# Altium PCB PCB2.PcbDoc (part 2 of 2)
Units mil, origin at the board's own origin, x right, y up, seen from the top; angles counter-clockwise.
Board outline 3622.05 x 2165.35 mil, 4 copper layers (Top Layer, GND, Sign, Bottom Layer), stack 23.756 mil thick; 141 components, 92 nets, 526 pads, 935 vias.
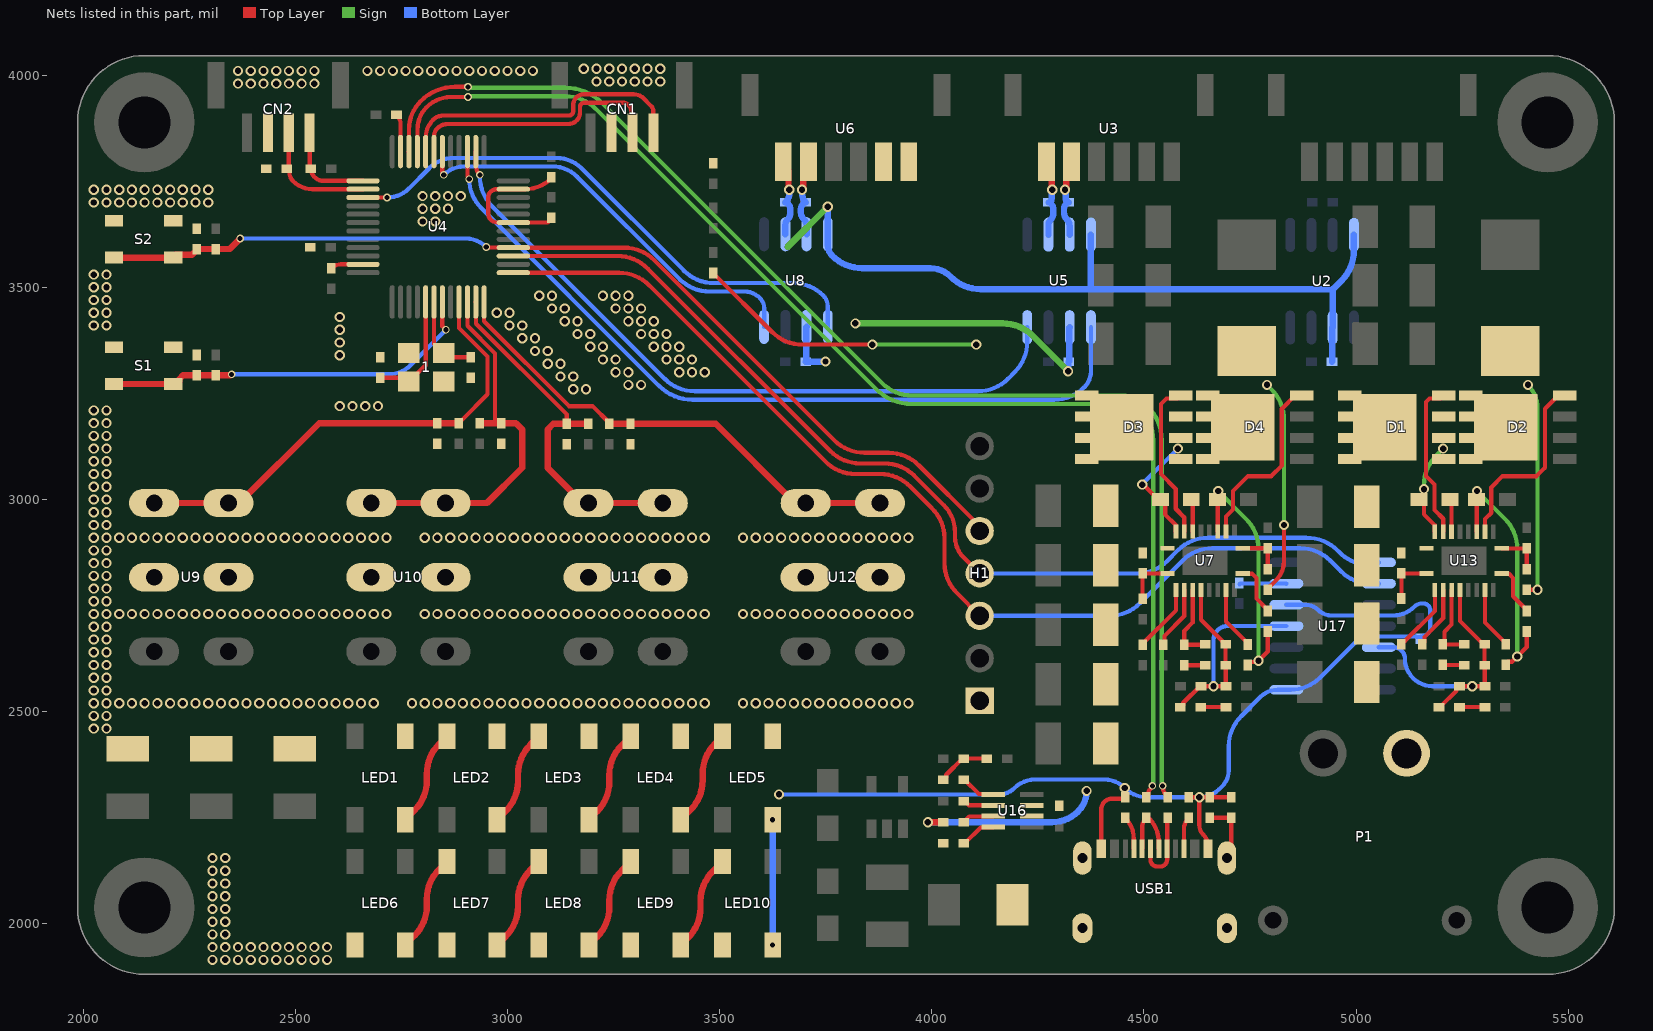
[diagram p4: the nets of this part, all layers, seen from the top]

## Via types
v1: diameter 24, hole 15, Top Layer to Bottom Layer, 881 vias
v2: diameter 18, hole 12, Top Layer to Bottom Layer, 51 vias
v3: diameter 28, hole 15, Top Layer to Bottom Layer, 2 vias
v4: diameter 30, hole 18, Top Layer to Bottom Layer, 1 vias

## Nets (pads, with @x,y where several pads share a name; then routed paths per layer and width w, separated by ;. In a path a pad name is that pad's centre, name@x,y a point inside that pad or via, vN(x,y) a via of type N, cw(c..) or ccw(c..) an arc to the next point about the centre after c; other vN are vias at no path point) (continued)
FDCAN2_N: R3.1 U3.6 U5.6 | length 179.1
  Top Layer w15: U3.6@4270.31,3795.51 cw(c4241.18,3766.38) 4282.38,3766.38 4282.38,3734.16 ccw(c4288.26,3734.16) v1(4284.1,3730)
  Bottom Layer w15: U5.6@4275,3624.15 4275,3645.89 cw(c4294.8,3645.89) 4280.8,3659.89 ccw(c4266.8,3673.9) 4286.6,3673.9 4286.6,3684.47 ccw(c4271.07,3684.47) R3.1@4282.05,3695.45 ; R3.1@4275,3700 ccw(c4275,3706.04) 4279.27,3701.77 ccw(c4271.76,3709.28) 4282.38,3709.28 4282.38,3725.84 cw(c4288.26,3725.84) v1(4284.1,3730)
FDCAN2_P: R3.2 U3.5 U5.7 | length 180
  Top Layer w15: v1(4314.1,3730) 4314.1,3730.26 cw(c4319.35,3730.26) 4315.64,3733.97 ccw(c4311.92,3737.69) 4317.18,3737.69 4317.18,3766.09 cw(c4358.78,3766.09) U3.5@4329.36,3795.51
  Bottom Layer w15: v1(4314.1,3730) cw(c4309.94,3725.84) 4315.82,3725.84 4315.82,3709.28 ccw(c4326.44,3709.28) 4318.93,3701.77 ccw(c4323.2,3706.04) R3.2@4323.2,3700 ; R3.2@4316.15,3695.45 ccw(c4327.13,3684.47) 4311.6,3684.47 4311.6,3676.07 ccw(c4334.48,3676.07) 4318.3,3659.89 cw(c4302.12,3643.72) 4325,3643.72 U5.7@4325,3624.15
FDCAN2_RX: U4.26 U5.4 | length 1674.8
  Top Layer w10: U4.26@2925.35,3819.88 2925.35,3788.29 ccw(c2958.29,3788.29) v2(2935,3765)
  Bottom Layer w10: v2(2935,3765) 2935,3761.42 ccw(c3035,3761.42) 2964.29,3690.71 3370.71,3284.29 ccw(c3441.42,3355) 3441.42,3255 4108.58,3255 ccw(c4108.58,3355) 4179.29,3284.29 4195.71,3300.71 ccw(c4125,3371.42) 4225,3371.42 U5.4@4225,3405.85
FDCAN2_TX: U4.27 U5.1 | length 1898.8
  Top Layer w10: U4.27@2905.67,3819.88 2905.67,3765.46 ccw(c2920.46,3765.46) v2(2910,3755)
  Bottom Layer w10: v2(2910,3755) ccw(c3006.57,3755) 2938.28,3686.72 3357.18,3267.82 ccw(c3436.42,3347.07) 3436.42,3235 4288.58,3235 ccw(c4288.58,3335) 4359.29,3264.29 ccw(c4321.36,3302.22) 4375,3302.22 U5.1@4375,3405.85
FDCAN3_N: R5.1 U6.6 U8.6 | length 209.1
  Top Layer w15: U6.6@3662.42,3766.09 ccw(c3620.82,3766.09) U6.6@3650.23,3795.51 cw(c3620.92,3766.19) 3662.38,3766.19 3662.38,3734.16 ccw(c3668.26,3734.16) v1(3664.1,3730)
  Bottom Layer w15: U8.6@3655,3625 3655,3646.74 cw(c3674.8,3646.74) 3660.8,3660.74 ccw(c3646.8,3674.75) 3666.6,3674.75 3666.6,3684.47 ccw(c3651.07,3684.47) R5.1@3662.05,3695.45 ; R5.1@3655,3700 ccw(c3633.03,3721.97) 3664.1,3721.97 v1(3664.1,3730)
FDCAN3_P: R5.2 U6.5 U8.7 | length 177.3
  Top Layer w15: v1(3694.1,3730) 3694.1,3730.31 cw(c3699.22,3730.31) 3695.6,3733.93 ccw(c3691.98,3737.55) 3697.1,3737.55 3697.1,3766.09 cw(c3738.7,3766.09) U6.5@3709.28,3795.51
  Bottom Layer w15: v1(3694.1,3730) 3694.1,3721.97 ccw(c3725.17,3721.97) R5.2@3703.2,3700 ; R5.2@3696.15,3695.45 ccw(c3707.13,3684.47) 3691.6,3684.47 3691.6,3676.92 ccw(c3714.48,3676.92) 3698.3,3660.74 cw(c3682.12,3644.57) 3705,3644.57 U8.7@3705,3625
FDCAN3_RX: U4.30 U8.4 | length 995.4
  Top Layer w10: U4.30@2846.61,3819.88 2846.61,3773.18 ccw(c2858.18,3773.18) v2(2850,3765)
  Bottom Layer w10: v2(2850,3765) cw(c2898.28,3716.72) 2898.28,3785 3105.65,3785 cw(c3105.65,3702.07) 3164.29,3760.71 3405.71,3519.29 ccw(c3476.42,3590) 3476.42,3490 3558.79,3490 cw(c3558.79,3438.79) 3595,3475 cw(c3570.86,3450.86) 3605,3450.86 U8.4@3605,3406.7
FDCAN3_TX: U4.39 U8.1 | length 1320
  Top Layer w10: U4.39@2659.61,3711.61 v2(2716.1,3711.61)
  Bottom Layer w10: v2@2720,3710 ccw(c2716.1,3706.1) v2(2716.1,3711.61) ccw(c2716.1,3785.27) 2768.19,3733.19 2815.71,3780.71 cw(c2874.35,3722.07) 2874.35,3805 3115.65,3805 cw(c3115.65,3722.07) 3174.29,3780.71 3415.71,3539.29 ccw(c3486.42,3610) 3486.42,3510 3673.58,3510 cw(c3673.58,3410) 3744.29,3480.71 cw(c3718.43,3454.85) 3755,3454.85 U8.1@3755,3406.7
GND: 1.2 1.4 C1.2 C2.2 C3.1 C4.1 C5.1 C6.1 C7.2 C8.1 C9.2 C10.1 C11.2 C14.1 C17.1 C20.1 C21.1 C32.1 C33.1 C34.1 C35.1 C69.1 CN1.2 CN2.2 H1.1 LED1.3 LED2.3 LED3.3 LED4.3 LED5.3 LED6.3 LED7.3 LED8.3 LED9.3 LED10.3 R1.1 R6.2 R10.2 R14.2 R44.1 R45.2 S1.1 S2.1 U2.2 U2.8 U4.19 U4.23 U4.35 U4.47 U5.2 U5.8 U8.2 U8.8 U9.2 U9.5 U10.2 U10.5 U11.2 U11.5 U12.2 U12.5 U17.1 U17.5 USB1.1 USB1.12 | length 5814
  Top Layer w8: v1(4455,2320) 4455.63,2319.37 R14.2@4455.63,2298.2
  Top Layer w10: C6.1@2585,3545 cw(c2607.05,3522.95) 2607.05,3554.13 U4.47@2659.61,3554.13 ; C11.2@2738.46,3906.85 cw(c2714.99,3883.38) 2748.19,3883.38 U4.35@2748.19,3819.88 ; C10.1@3103.46,3663.65 3103.46,3661.15 3094.87,3652.56 U4.19@3013.94,3652.56 2977.97,3652.56 cw(c2977.97,3677.97) 2960,3660 cw(c2972.07,3672.07) 2955,3672.07 2955,3712.93 cw(c2972.07,3712.93) 2960,3725 cw(c2975.21,3709.79) 2975.21,3731.3 U4.23@3013.94,3731.3 3041.78,3731.3 ccw(c3041.78,3818.54) 3103.43,3756.81 ccw(c3041.78,3818.54) 3103.46,3756.85 C5.1@3103.46,3759.35 C5.1@3103.46,3761.85 ; USB1.1@4399.37,2176.65 4399.37,2269.37 cw(c4425,2269.37) 4425,2295 4452.43,2295 ccw(c4452.43,2298.2) R14.2@4455.63,2298.2 ; R6.2@4605.63,2298.2 v1(4630.63,2298.2) ; USB1.12@4651.34,2176.65 4651.34,2182.63 ccw(c4612.63,2182.63) 4640,2210 cw(c4662.62,2232.62) 4630.63,2232.62 v1(4630.63,2298.2) ; C9.2@4705.63,2298.2 R10.2@4655.63,2298.2 v1(4630.63,2298.2)
  Sign w15: 3660,3595 v1(3755,3690) ; v1(3820,3415) 4167.16,3415 cw(c4167.16,3315) 4237.87,3385.71 v1(4321.36,3302.22)
  Bottom Layer w10: v1(3640,2305) 4158.79,2305 ccw(c4158.79,2356.21) 4195,2320 cw(c4243.28,2271.72) 4243.28,2340 4406.72,2340 cw(c4406.72,2271.72) v1(4455,2320) ccw(c4507.63,2372.63) 4507.63,2298.2 v1(4630.63,2298.2) ccw(c4630.63,2364.76) 4677.69,2317.7 4685,2325 ccw(c4648.79,2361.21) 4700,2361.21 4700,2418.58 cw(c4800,2418.58) 4729.29,2489.29 4775,2535 cw(c4815.25,2494.75) 4815.25,2551.67 U17.1@4835.64,2551.67 4845.25,2551.67 ccw(c4845.25,2651.67) 4915.96,2580.96 5000.77,2665.77 cw(c5028.8,2637.74) 5028.8,2677.38 5136.52,2677.38 cw(c5136.52,2658.32) 5143.46,2676.07 5148.45,2676.07 ccw(c5148.45,2706.55) 5170,2685 ccw(c5157.93,2697.07) 5175,2697.07 5175,2737.93 ccw(c5157.93,2737.93) 5170,2750 ccw(c5157.93,2737.93) 5157.93,2755 5155.4,2755 ccw(c5155.4,2730.13) 5137.82,2747.72 cw(c5087.23,2798.31) 5087.23,2726.76 4941.96,2726.76 cw(c4941.96,2771.96) 4910,2740 ccw(c4881.82,2711.82) 4881.82,2751.67 U17.5@4835.64,2751.67
  Bottom Layer w15: U8.2@3705,3406.7 3704.1,3405.8 3704.1,3325.9 C7.2@3703.2,3325 3749.64,3325 v1(3749.71,3325.07) ; v1(3755,3690) U8.8@3755,3625 3755,3599.14 ccw(c3789.14,3599.14) 3765,3575 3765.71,3574.29 ccw(c3836.42,3645) 3836.42,3545 3996.72,3545 cw(c3996.72,3476.72) 4045,3525 ccw(c4115.32,3593.92) 4115.26,3495.46 4375,3495.46 ; v1(4321.36,3302.22) 4322.28,3303.14 4322.28,3324.08 C2.2@4323.2,3325 4324.1,3325.9 4324.1,3404.95 U5.2@4325,3405.85 ; U5.8@4375,3624.15 4375,3495.46 ; C1.2@4943.2,3325 4943.98,3325.78 4943.98,3404.52 U2.2@4944.76,3405.3 4944.76,3494.76 ; U2.8@4994.76,3623.6 4994.76,3586.19 cw(c4894.76,3586.19) 4965.47,3515.47 4944.76,3494.76 ; 4375,3495.46 4944.76,3495.46 4945,3495.46 4944.76,3494.76
  other v1: 2305,1915 2335,1915 2365,1915 2395,1915 2425,1915 2455,1915 2485,1915 2515,1915 2545,1915 2575,1915 2305,1945 2335,1945 2365,1945 2395,1945 2425,1945 2455,1945 2485,1945 2515,1945 2545,1945 2575,1945 2305,1975 2335,1975 2305,2005 2335,2005 2305,2035 2335,2035 2305,2065 2335,2065 2305,2095 2335,2095 2305,2125 2335,2125 2305,2155 2335,2155 2025,2460 2055,2460 2025,2490 2055,2490 2025,2520 2055,2520 2085,2520 2115,2520 2145,2520 2175,2520 2205,2520 2235,2520 2265,2520 2295,2520 2325,2520 2355,2520 2385,2520 2415,2520 2445,2520 2475,2520 2505,2520 2535,2520 2565,2520 2595,2520 2625,2520 2655,2520 2685,2520 2775,2520 2805,2520 2835,2520 2865,2520 2895,2520 2925,2520 2955,2520 2985,2520 3015,2520 3045,2520 3075,2520 3105,2520 3135,2520 3165,2520 3195,2520 3225,2520 3255,2520 3285,2520 3315,2520 3345,2520 3375,2520 3405,2520 3435,2520 3465,2520 3555,2520 3585,2520 3615,2520 3645,2520 3675,2520 3705,2520 3735,2520 3765,2520 3795,2520 3825,2520 3855,2520 3885,2520 3915,2520 3945,2520 2025,2550 2055,2550 2025,2580 2055,2580 2025,2610 2055,2610 2025,2640 2055,2640 2025,2670 2055,2670 2025,2700 2055,2700 2025,2730 2055,2730 2085,2730 2115,2730 2145,2730 2175,2730 2205,2730 2235,2730 2265,2730 2295,2730 2325,2730 2355,2730 2385,2730 2415,2730 2445,2730 2475,2730 2505,2730 2535,2730 2565,2730 2595,2730 2625,2730 2655,2730 2685,2730 2715,2730 2805,2730 2835,2730 2865,2730 2895,2730 2925,2730 2955,2730 2985,2730 3015,2730 3045,2730 3075,2730 3105,2730 3135,2730 3165,2730 3195,2730 3225,2730 3255,2730 3285,2730 3315,2730 3345,2730 3375,2730 3405,2730 3435,2730 3465,2730 3555,2730 3585,2730 3615,2730 3645,2730 3675,2730 3705,2730 3735,2730 3765,2730 3795,2730 3825,2730 3855,2730 3885,2730 3915,2730 3945,2730 2025,2760 2055,2760 2025,2790 2055,2790 2025,2820 2055,2820 2025,2850 2055,2850 2025,2880 2055,2880 2025,2910 2055,2910 2085,2910 2115,2910 2145,2910 2175,2910 2205,2910 2235,2910 2265,2910 2295,2910 2325,2910 2355,2910 2385,2910 2415,2910 2445,2910 2475,2910 2505,2910 2535,2910 2565,2910 2595,2910 2625,2910 2655,2910 2685,2910 2715,2910 2805,2910 2835,2910 2865,2910 2895,2910 2925,2910 2955,2910 2985,2910 3015,2910 3045,2910 3075,2910 3105,2910 3135,2910 3165,2910 3195,2910 3225,2910 3255,2910 3285,2910 3315,2910 3345,2910 3375,2910 3405,2910 3435,2910 3465,2910 3555,2910 3585,2910 3615,2910 3645,2910 3675,2910 3705,2910 3735,2910 3765,2910 3795,2910 3825,2910 3855,2910 3885,2910 3915,2910 3945,2910 2025,2940 2055,2940 2025,2970 2055,2970 2025,3000 2055,3000 2025,3030 2055,3030 2025,3060 2055,3060 2025,3090 2055,3090 2025,3120 2055,3120 2025,3150 2055,3150 2025,3180 2055,3180 2025,3210 2055,3210 2605,3220 2635,3220 2665,3220 2695,3220 3155,3260 3185,3260 3285,3270 3315,3270 3125,3290 3155,3290 3255,3300 3285,3300 3405,3300 3435,3300 3465,3300 3095,3320 3125,3320 3225,3330 3255,3330 3375,3330 3405,3330 3435,3330 2605,3340 3065,3350 3095,3350 3195,3360 3225,3360 3345,3360 3375,3360 3405,3360 2605,3370 3035,3380 3065,3380 3165,3390 3195,3390 3315,3390 3345,3390 3375,3390 2605,3400 2025,3410 2055,3410 3005,3410 3035,3410 3135,3420 3165,3420 3285,3420 3315,3420 3345,3420 2605,3430 2025,3440 2055,3440 2975,3440 3005,3440 3105,3450 3135,3450 3255,3450 3285,3450 3315,3450 2025,3470 2055,3470 3075,3480 3105,3480 3225,3480 3255,3480 3285,3480 2025,3500 2055,3500 2025,3530 2055,3530 2800,3655 2830,3655 2800,3685 2830,3685 2860,3685 2025,3700 2055,3700 2085,3700 2115,3700 2145,3700 2175,3700 2205,3700 2235,3700 2265,3700 2295,3700 2800,3715 2830,3715 2860,3715 2890,3715 2025,3730 2055,3730 2085,3730 2115,3730 2145,3730 2175,3730 2205,3730 2235,3730 2265,3730 2295,3730 2365,3980 2395,3980 2425,3980 2455,3980 2485,3980 2515,3980 2545,3980 3210,3985 3240,3985 3270,3985 3300,3985 3330,3985 3360,3985 2365,4010 2395,4010 2425,4010 2455,4010 2485,4010 2515,4010 2545,4010 2670,4010 2700,4010 2730,4010 2760,4010 2790,4010 2820,4010 2850,4010 2880,4010 2910,4010 2940,4010 2970,4010 3000,4010 3030,4010 3060,4010 3180,4015 3210,4015 3240,4015 3270,4015 3300,4015 3330,4015 3360,4015
Net1_1: 1.1 C4.2 U4.6 | length 198.8
  Top Layer w10: U4.6@2826.93,3465.55 2826.93,3366.22 2847.83,3345.32 1.1@2849.8,3345.32 2860.07,3335.05 C4.2@2913.46,3335.05
Net1_3: 1.3 C3.2 U4.5 | length 275.5
  Top Layer w10: C3.2@2700,3286.8 2760.68,3286.8 2769.09,3278.39 2807.24,3316.53 U4.5@2807.24,3465.55
NetC8_2: C8.2 R4.1 S1.2 U4.7 | length 904.1
  Top Layer w10: U4.7@2846.61,3465.55 2846.61,3408.39 v2(2855,3400)
  Top Layer w15: S1.2@2072.68,3272.28 S1.2@2212.44,3272.28 2220.32,3272.28 2226.6,3278.56 2226.6,3283.6 2235.38,3292.39 C8.2@2267.56,3292.39 R4.1@2312.56,3292.39 2346.58,3292.39 2349.19,3295 v2(2350,3295)
  Bottom Layer w10: v2(2350,3295) 2720,3295 ccw(c2720,3367.43) 2771.21,3316.21 v2(2855,3400)
NetC9_1: C9.1 R10.1 USB1.13 USB1.14 | length 147.7
  Top Layer w10: R10.1@4655.63,2250 C9.1@4705.63,2250 4705.63,2179.14 cw(c4671.49,2179.14) USB1.14@4695.63,2155
NetC15_1: C15.1 R12.1 | length 60.1
  Top Layer w10: C15.1@5243.71,2510.83 R12.1@5303.78,2510.83
NetC24_1: C24.1 C25.2 U13.4 | length 186.8
  Top Layer w10: U13.4@5225.1,2786.41 5225.1,2705.1 5208.26,2688.26 5208.26,2662.38 C24.1@5204.34,2658.46 5208.26,2658.46 C25.2@5254.57,2658.46
NetC24_2: C24.2 R25.2 | length 50.6
  Top Layer w10: C24.2@5204.34,2610.26 5204.85,2609.76 5254.06,2609.76 R25.2@5254.57,2609.25
NetC41_1: C41.1 C43.2 U7.4 | length 186.9
  Top Layer w10: U7.4@4614.86,2786.5 4614.86,2709.86 4595.12,2690.12 C41.1@4595.12,2657.45 4595.62,2657.96 4643.82,2657.96 C43.2@4644.33,2658.46
NetC41_2: C41.2 R23.2 | length 49.2
  Top Layer w10: C41.2@4595.12,2609.25 R23.2@4644.33,2609.25
NetC42_1: C42.1 D1.3 D2.2 L1.1 R32.1 U13.19 | length 742.9
  Top Layer w10: v1(5160,3024.39) 5160,3010 5150,3000 5160,2990 5160,2965 5185.15,2939.85 5185.15,2924.65 U13.19@5185.67,2924.13 ; R32.1@5402.2,2787.43 v1(5427.43,2787.43)
  Sign w10: v1(5160,3024.39) 5160,3033.58 cw(c5260,3033.58) 5189.29,3104.29 v1(5205,3120) ; v1(5405,3270) cw(c5350.85,3215.85) 5427.43,3215.85 v1(5427.43,2787.43)
NetC42_2: C42.2 U13.17 | length 77.3
  Top Layer w10: C42.2@5221.5,3000 5225.04,2996.46 U13.17@5225.04,2924.13
NetC44_1: C44.1 U13.3 | length 148.4
  Top Layer w10: C44.1@5156.14,2658.46 5161.14,2663.46 5161.14,2676.14 5205.42,2720.42 U13.3@5205.42,2786.41
NetC49_2: C49.2 R30.2 R40.2 U13.14 | length 629.9
  Top Layer w10: U13.14@5284.1,2924.13 5284.1,2999.4 5285,3000.31 v1(5285,3020) ; R40.2@5352.99,2610.26 5352.99,2612.76 5357.99,2617.76 5367.14,2617.76 5379.38,2630 v1(5380,2630) ; v1@5377.32,2627.32 v1(5380,2630) ; R30.2@5402.2,2689 5402.2,2652.2 v1(5380,2630)
  Sign w10: v1(5285,3020) 5350.71,2954.29 cw(c5280,2883.58) 5380,2883.58 v1(5380,2630)
NetC50_2: C50.2 R32.2 U13.11 | length 108.2
  Top Layer w10: U13.11@5343.15,2884.76 5343.19,2884.8 C50.2@5402.2,2884.84 R32.2@5402.2,2835.63
NetC51_1: C51.1 R22.1 | length 60.1
  Top Layer w10: C51.1@4633.48,2510.83 R22.1@4693.54,2510.83
NetC52_1: C52.1 D3.3 D4.2 L2.1 R33.1 U7.19 | length 776.3
  Top Layer w10: v1(4496.15,3035) 4498.5,3035 4533.5,3000 C52.1@4538.5,3000 4540,3000 4550,2990 4550,2965 4574.92,2940.08 4574.92,2924.73 U7.19@4575.43,2924.22 ; R33.1@4791.97,2787.43 4791.97,2789.93 4810.98,2808.95 ccw(c4765.08,2854.85) 4830,2854.85 v1(4830,2940)
  Sign w10: v1(4790,3270) 4800.71,3259.29 cw(c4730,3188.58) 4830,3188.58 v1(4830,2940)
  Bottom Layer w10: v1(4496.15,3035) 4496.15,3036.16 v1(4580,3120)
NetC52_2: C52.2 U7.17 | length 77.1
  Top Layer w10: C52.2@4611.5,3000 4614.8,2996.7 U7.17@4614.8,2924.22
NetC53_1: C53.1 U7.3 | length 149.5
  Top Layer w10: C53.1@4545.91,2657.45 4548.54,2660.08 4548.54,2678.54 4595.18,2725.18 U7.3@4595.18,2786.5
NetC59_2: C59.2 R31.2 R42.2 U7.14 | length 640
  Top Layer w10: U7.14@4673.86,2924.22 4673.86,2999.64 C59.2@4673.5,3000 ccw(c4669.88,3003.62) 4675,3003.62 v1(4675,3020) ; R42.2@4745,2610 4745,2612.32 4750,2617.32 4767.32,2617.32 v1(4770,2620) 4791.97,2641.97 R31.2@4791.97,2689
  Sign w10: v1(4675,3020) 4740.71,2954.29 cw(c4670,2883.58) 4770,2883.58 v1(4770,2620)
NetC60_2: C60.2 R33.2 U7.11 | length 108.3
  Top Layer w10: U7.11@4732.91,2884.85 C60.2@4791.97,2884.84 R33.2@4791.97,2835.63
NetC62_1: C62.1 U16.4 | length 86.1
  Top Layer w10: C62.1@4075,2189.37 4077.5,2189.37 4115.41,2227.28 4144.09,2227.28 U16.4@4145,2228.19
NetC62_2: C62.2 L3.1 U16.6
NetC68_2: C68.2 U16.2 | length 74.1
  Top Layer w10: C68.2@4075,2289.37 4077.5,2289.37 4087.5,2279.37 U16.2@4145,2279.37
NetD1_1: D1.1 U13.18 | length 370.5
  Top Layer w10: U13.18@5205.36,2924.13 5205.36,2954.64 5184.92,2975.08 5184.92,3035.08 5165,3055 5165,3230 5173.27,3238.27 5199.61,3238.27 D1.1@5206.62,3245.28
NetD2_1: D2.1 U13.13 | length 455
  Top Layer w10: U13.13@5303.84,2924.21 5303.84,2953.84 5318.49,2968.49 5318.49,3028.49 5345,3055 5425,3055 5445,3075 5445,3213.78 5476.5,3245.28 D2.1@5492.05,3245.28
NetD3_1: D3.1 U7.18 | length 378.5
  Top Layer w10: D3.1@4586.54,3245.28 4579.53,3238.27 4553.27,3238.27 4540,3225 4540,3060 4575,3025 4575,2978.03 4595.12,2957.92 U7.18@4595.12,2924.22
NetD4_1: D4.1 U7.13 | length 436.2
  Top Layer w10: U7.13@4693.6,2924.3 4693.6,2959.81 4710,2976.22 4710,3020 4745,3055 4800,3055 4825,3080 4825,3213.86 4856.42,3245.28 D4.1@4871.97,3245.28
NetLED1_2: LED1.2 LED2.4 | length 229
  Top Layer w15: LED1.2@2758.93,2245.24 2780.71,2267.02 ccw(c2710,2337.73) 2810,2337.73 2810,2353.29 cw(c2910,2353.29) 2839.29,2424 LED2.4@2857.37,2442.09
NetLED2_2: LED2.2 LED3.4 | length 229
  Top Layer w15: LED2.2@2975.47,2245.24 2995.71,2265.47 ccw(c2925,2336.19) 3025,2336.19 3025,2351.77 cw(c3125,2351.77) 3054.29,2422.48 LED3.4@3073.9,2442.09
NetLED3_2: LED3.2 LED4.4 | length 229
  Top Layer w15: LED3.2@3192,2245.24 3210.71,2263.95 ccw(c3140,2334.66) 3240,2334.66 3240,2350.23 cw(c3340,2350.23) 3269.29,2420.94 LED4.4@3290.43,2442.09
NetLED4_2: LED4.2 LED5.4 | length 229
  Top Layer w15: LED4.2@3408.53,2245.24 3430.71,2267.41 ccw(c3360,2338.12) 3460,2338.12 3460,2353.69 cw(c3560,2353.69) 3489.29,2424.4 LED5.4@3506.98,2442.09
NetLED5_2: LED5.2 LED10.4 | length 295.3
  Top Layer w15: v2(3625.04,2245.2) LED5.2@3625.08,2245.24
  Bottom Layer w15: v2(3625.04,1949.96) v2(3625.04,2245.2)
NetLED6_4: LED6.4 LED7.2 | length 229
  Top Layer w15: LED6.4@2758.94,1949.96 2780.71,1971.73 ccw(c2710,2042.44) 2810,2042.44 2810,2058.02 cw(c2910,2058.02) 2839.29,2128.73 LED7.2@2857.37,2146.81
NetLED7_4: LED7.4 LED8.2 | length 229
  Top Layer w15: LED7.4@2975.47,1949.96 2995.71,1970.2 ccw(c2925,2040.91) 3025,2040.91 3025,2056.49 cw(c3125,2056.49) 3054.29,2127.2 LED8.2@3073.9,2146.81
NetLED8_4: LED8.4 LED9.2 | length 229
  Top Layer w15: LED8.4@3192,1949.96 3210.71,1968.67 ccw(c3140,2039.38) 3240,2039.38 3240,2054.95 cw(c3340,2054.95) 3269.29,2125.66 LED9.2@3290.44,2146.81
NetLED9_4: LED9.4 LED10.2 | length 229
  Top Layer w15: LED9.4@3408.54,1949.96 3425.71,1967.13 ccw(c3355,2037.84) 3455,2037.84 3455,2053.41 cw(c3555,2053.41) 3484.29,2124.12 LED10.2@3506.98,2146.81
NetR6_1: R6.1 USB1.10 | length 76.4
  Top Layer w10: USB1.10@4594.26,2176.65 4594.26,2222.54 cw(c4633.09,2222.54) R6.1@4605.63,2250
NetR7_1: R7.1 USB1.6 USB1.8 | length 182
  Top Layer w10: USB1.6@4515.51,2176.65 4515.51,2150.85 ccw(c4530.85,2150.85) 4520,2140 ccw(c4532.07,2152.07) 4532.07,2135 4537.93,2135 ccw(c4537.93,2152.07) 4550,2140 ccw(c4538.23,2151.77) 4554.88,2151.77 USB1.8@4554.88,2176.65 4554.88,2248.18 cw(c4557.45,2248.18) R7.1@4555.63,2250
NetR8_1: R8.1 USB1.5 USB1.7 | length 160.9
  Top Layer w10: USB1.5@4495.83,2176.65 4495.83,2226.33 cw(c4529.3,2226.33) R8.1@4505.63,2250 R8.1@4506.35,2250 ; R8.1@4506.41,2250 4510.49,2250 R8.1@4513.42,2247.07 ; R8.1@4513.43,2247.06 4513.6,2246.89 cw(c4451.7,2190.79) 4535.2,2188.28 4535.2,2188.19 ccw(c4545.2,2188.07) 4535.2,2188.11 USB1.7@4535.2,2176.65
NetR9_2: R9.2 R11.2 U13.1 | length 118.1
  Top Layer w10: R11.2@5106.93,2766.73 R9.2@5106.93,2825.79 5106.97,2825.75 5165.95,2825.75 U13.1@5165.99,2825.7
NetR14_1: R14.1 USB1.4 | length 78.8
  Top Layer w10: R14.1@4455.63,2250 cw(c4406.1,2200.47) 4476.15,2200.47 USB1.4@4476.15,2176.65
NetR20_2: R20.2 R21.2 U7.1 | length 119.1
  Top Layer w10: R21.2@4496.69,2765.72 R20.2@4496.69,2825.79 U7.1@4555.75,2825.79
NetR24_1: R24.1 U13.2 | length 162.1
  Top Layer w10: R24.1@5106.93,2658.46 5106.93,2660.96 5111.93,2665.96 5114.43,2665.96 5185.73,2737.26 U13.2@5185.73,2786.41
NetR28_1: R28.1 U7.2 | length 161.7
  Top Layer w10: R28.1@4496.69,2657.45 4496.69,2659.95 4575.49,2738.75 U7.2@4575.49,2786.5
NetR30_1: R30.1 U13.10 | length 122.4
  Top Layer w10: U13.10@5343.15,2825.7 5343.66,2825.19 5359.81,2825.19 5370,2815 5370,2771.91 5402.2,2739.7 R30.1@5402.2,2737.2
NetR31_1: R31.1 U7.10 | length 125.5
  Top Layer w10: U7.10@4732.91,2825.79 4733.42,2825.28 4754.72,2825.28 4765,2815 4765,2766.67 4791.97,2739.7 R31.1@4791.97,2737.2
NetR36_2: R36.2 U16.3 | length 77.4
  Top Layer w10: R36.2@4075,2239.37 4077.5,2239.37 4082.5,2244.37 4082.5,2246.87 4088.5,2252.87 4144.09,2252.87 U16.3@4145,2253.78
NetR37_1: R37.1 R38.2 R39.2 | length 127.9
  Top Layer w10: R38.2@4026.8,2339.37 4029.3,2339.37 4034.3,2344.37 4034.3,2351.17 4072.5,2389.37 R37.1@4075,2389.37 R39.2@4130,2389.37
NetR38_1: R38.1 U16.1 | length 84.3
  Top Layer w10: R38.1@4075,2339.37 4077.5,2339.37 4111,2305.87 4144.09,2305.87 U16.1@4145,2304.96
NetR40_1: R40.1 U13.8 | length 148.3
  Top Layer w10: U13.8@5303.84,2786.41 5303.84,2710.12 5352.99,2660.96 R40.1@5352.99,2658.46
NetR42_1: R42.1 U7.8 | length 149.6
  Top Layer w10: U7.8@4693.6,2786.5 4693.6,2712.1 4745,2660.7 R42.1@4745,2658.2
NetR43_1: R43.1 U17.6 | length 111.9
  Bottom Layer w10: R43.1@4725,2800 4727.06,2802.06 4835.64,2802.06 U17.6@4835.64,2801.67
OLED_RESET: C17.2 H1.5 R19.1 S2.2 U4.16 | length 2336.5
  Top Layer w10: v2(2950,3595) 2951.15,3593.85 3013.59,3593.85 U4.16@3013.94,3593.5 3275.08,3593.5 cw(c3275.08,3493.5) 3345.79,3564.21 3770.71,3139.29 ccw(c3841.42,3210) 3841.42,3110 3898.58,3110 cw(c3898.58,3010) 3969.29,3080.71 4112.83,2937.17 H1.5@4112.83,2925.79
  Top Layer w15: S2.2@2072.68,3570.08 S2.2@2212.44,3570.08 2218.72,3576.36 2256.23,3576.36 2267.56,3587.69 C17.2@2267.56,3590.19 R19.1@2312.56,3590.19 2345.19,3590.19 v2(2370,3615)
  Bottom Layer w10: v2(2370,3615) 2901.72,3615 cw(c2901.72,3546.72) v2(2950,3595)
SPI1_MOSI: H1.4 U4.15 U17.8 | length 2417.8
  Top Layer w10: U4.15@3013.94,3573.82 3259.76,3573.82 cw(c3259.76,3473.82) 3330.47,3544.53 3760.71,3114.29 ccw(c3831.42,3185) 3831.42,3085 3888.58,3085 cw(c3888.58,2985) 3959.29,3055.71 4028,2987 cw(c3962.8,2921.81) 4055,2921.81 4055,2910.93 ccw(c4120.93,2910.93) 4074.31,2864.31 H1.4@4112.83,2825.79
  Bottom Layer w10: H1.4@4112.83,2825.79 4484.37,2825.79 ccw(c4484.37,2925.79) 4555.08,2855.08 4580.71,2880.71 cw(c4651.42,2810) 4651.42,2910 4881.85,2910 cw(c4881.91,2802.72) 4957.61,2878.73 cw(c4950.55,2871.65) 4957.97,2878.35 ccw(c5028.99,2942.11) 4989.85,2855.07 4989.98,2855.01 ccw(c5005.58,2889.81) 5005.58,2851.67 ; 5005.63,2851.67 U17.8@5053.68,2851.67
SPI1_SCK: H1.3 U4.13 U17.9 | length 2519.3
  Top Layer w10: U4.13@3013.94,3534.45 3262.71,3534.45 cw(c3262.71,3434.45) 3333.42,3505.16 3749.29,3089.29 ccw(c3820,3160) 3820,3060 3878.58,3060 cw(c3878.58,2960) 3949.29,3030.71 4000.71,2979.29 cw(c3930,2908.58) 4030,2908.58 4030,2850.04 ccw(c4130,2850.04) 4059.29,2779.33 H1.3@4112.83,2725.79
  Bottom Layer w10: H1.3@4112.83,2725.79 4419.37,2725.79 ccw(c4419.37,2825.79) 4490.08,2755.08 4590.71,2855.71 cw(c4661.42,2785) 4661.42,2885 4868.58,2885 cw(c4868.58,2785) 4939.29,2855.71 4964.04,2830.96 ccw(c5034.75,2901.67) 5034.75,2801.67 U17.9@5053.68,2801.67
SWCLK: CN2.3 R45.1 U4.38 | length 288.5
  Top Layer w10: R45.1@2480,3780 ccw(c2468.87,3791.13) 2484.61,3791.13 CN2.3@2484.61,3863.9 ; R45.1@2486.09,3781.4 2486.09,3771.51 ccw(c2516.51,3771.51) 2495,3750 ccw(c2540.15,3795.15) 2540.15,3731.3 U4.38@2659.61,3731.3
SWDIO: CN2.4 R41.1 U4.37 | length 223.9
  Top Layer w10: CN2.4@2533.82,3863.9 2533.82,3787.19 ccw(c2543.99,3787.19) R41.1@2536.8,3780 2536.8,3779.8 ccw(c2564.8,3779.8) 2545,3760 ccw(c2566.77,3781.77) 2566.77,3750.98 U4.37@2659.61,3750.98
Switch1: C32.2 R15.1 U4.9 U9.1 U9.4 | length 1138.4
  Top Layer w10: R15.1@2885,3180 2885,3182.5 2890,3187.5 2892.5,3187.5 2952.91,3247.91 2952.91,3337.09 2885.98,3404.02 U4.9@2885.98,3465.55
  Top Layer w15: U9.4@2167.44,2991.73 U9.1@2342.44,2991.73 2368.03,2991.73 2556.3,3180 2810,3180 C32.2@2835,3180 R15.1@2885,3180
Switch2: C33.2 R16.1 U4.10 U10.1 U10.4 | length 898.8
  Top Layer w10: U4.10@2905.67,3465.55 2905.67,3409.33 2970.96,3344.04 2970.96,3179.73
  Top Layer w15: U10.4@2679.25,2991.73 U10.1@2854.25,2991.73 2951.73,2991.73 3035,3075 3035,3165 3020,3180 C33.2@2985,3180 ; R16.1@2935.27,3179.73 2970.96,3179.73 C33.2@2984.73,3179.73
Switch3: C34.2 R17.1 U4.11 U11.1 U11.4 | length 894.2
  Top Layer w10: U4.11@2925.35,3465.55 2925.7,3465.2 2925.7,3414.3 3140,3200 C34.2@3140,3178.2 ; C34.2@3135,3178.55 C34.2@3135.35,3178.2
  Top Layer w15: R17.1@3185.35,3178.2 C34.2@3140,3178.2 3125,3178.2 3108.2,3178.2 3095,3165 3095,3074.13 3177.39,2991.73 U11.1@3366.06,2991.73 U11.1@3384.15,3009.82
Switch4: C35.2 R18.1 U4.12 U12.1 U12.4 | length 1157.3
  Top Layer w10: U4.12@2945.04,3465.55 2945.04,3419.96 3145,3220 3200.7,3220 3240,3180.7 R18.1@3240,3178.2
  Top Layer w15: R18.1@3240,3178.2 C35.2@3290,3178.2 3490.82,3178.2 3677.28,2991.73 U12.4@3702.87,2991.73 U12.1@3877.87,2991.73
USART1_RX: CN1.4 U4.32 | length 705.8
  Top Layer w10: U4.32@2807.24,3819.88 2807.24,3852.13 cw(c2867.87,3852.13) 2825,3895 cw(c2849.14,3870.86) 2849.14,3905 3145.89,3905 ccw(c3145.89,3912.87) 3151.46,3907.31 ccw(c3142.91,3915.85) 3155,3915.85 3155,3929.39 cw(c3180.61,3929.39) 3162.5,3947.5 cw(c3180.61,3929.39) 3180.61,3955 3297.65,3955 cw(c3297.65,3922.65) 3320.52,3945.52 3338.71,3927.34 cw(c3326.37,3915) 3343.82,3915 CN1.4@3343.82,3863.9
USART1_TX: CN1.3 U4.31 | length 614.4
  Top Layer w10: U4.31@2826.93,3819.88 2826.93,3855.52 cw(c2854.48,3855.52) 2835,3875 cw(c2859.14,3850.86) 2859.14,3885 3143.69,3885 ccw(c3143.69,3912.31) 3162.99,3892.99 ccw(c3143.69,3912.31) 3171,3912.31 3171,3925.72 cw(c3179.32,3925.72) 3173.44,3931.6 cw(c3181.64,3923.41) 3181.64,3935 3271.74,3935 cw(c3271.74,3915.06) 3285.84,3929.16 cw(c3271.74,3915.06) 3291.68,3915.06 3291.68,3866.83 CN1.3@3294.61,3863.9
USB_N: R8.2 U4.33 | length 3018.6
  Top Layer w10: U4.33@2787.56,3819.88 2787.87,3820.2 2787.87,3871.58 cw(c2863.42,3871.58) 2810,3925 cw(c2866.66,3868.34) 2866.66,3948.47 v2(2907.14,3948.47) ; R8.2@4505.63,2298.2 R8.2@4507,2299.57 ; R8.2@4507.01,2299.58 ccw(c4498.24,2308.33) 4510.63,2308.33 cw(c4523.02,2308.33) 4514.26,2317.09 4518.47,2321.3 ccw(c4514.77,2325) v2(4520,2325)
  Sign w10: v2(2907.14,3948.47) cw(c2910.83,3944.77) 2910.83,3950 2914.33,3950 cw(c2915.46,3948.87) 2915.46,3950.47 3136.91,3950.47 cw(c3136.91,3850.47) 3207.62,3921.18 3868.66,3260.15 ccw(c3953.51,3345) 3953.51,3225 4446.72,3225 cw(c4446.72,3156.72) 4495,3205 cw(c4429.82,3139.82) 4522,3139.82 4522,2332.66 ccw(c4523.13,2331.52) 4521.53,2331.52 4521.53,2328.7 cw(c4516.3,2328.7) v2(4520,2325)
USB_P: R7.2 U4.34 | length 3081.7
  Top Layer w10: U4.34@2767.56,3819.57 U4.34@2767.87,3819.88 2767.87,3871.58 cw(c2863.42,3871.58) 2795.86,3939.14 cw(c2876.32,3858.68) 2876.32,3972.47 v2(2907.14,3972.47) ; v2(4544,2325) cw(c4540.3,2321.3) 4545.53,2321.3 4545.53,2317.94 ccw(c4562.77,2317.94) R7.2@4550.57,2305.76 ; R7.2@4550.58,2305.75 4553.86,2302.47 cw(c4549.59,2298.2) R7.2@4555.63,2298.2
  Sign w10: v2(2907.14,3972.47) ccw(c2910.83,3976.17) 2910.83,3970.94 2914.33,3970.94 ccw(c2915.46,3972.07) 2915.46,3970.47 3136.91,3970.47 cw(c3136.91,3850.47) 3221.77,3935.32 3882.8,3274.29 ccw(c3953.51,3345) 3953.51,3245 4446.72,3245 cw(c4446.72,3156.72) 4509.14,3219.14 cw(c4429.82,3139.82) 4542,3139.82 4542,2332.66 cw(c4540.87,2331.52) 4542.47,2331.52 4542.47,2328.7 ccw(c4547.7,2328.7) v2(4544,2325)
VIN: C12.2 C13.2 C16.2 C23.2 C36.2 C37.2 C38.2 C39.2 C63.2 C64.2 D1.2 D3.2 P1.+ R9.1 R20.1 R34.2 R36.1 U6.1 U6.2 U7.20 U13.20 U16.7 | length 1136.4
  Top Layer w10: R34.2@3484.68,3533.78 3624.18,3394.29 ccw(c3694.89,3465) 3694.89,3365 v1(3860,3365)
  Top Layer w15: v1(3990.88,2239.37) R36.1@4026.8,2239.37
  Sign w10: v1(3860,3365) v1(4105,3365)
  Bottom Layer w15: v1(3990.88,2239.37) 4283.12,2239.37 ccw(c4283.12,2326.88) 4345,2265 ccw(c4296.72,2313.28) v1(4365,2313.28)
W2_1: C15.2 C25.1 R13.1 R25.1 R26.1 U13.5 U17.12 | length 656.9
  Top Layer w10: C15.2@5195.51,2510.83 5198.01,2510.83 5236.21,2549.03 5236.21,2555.04 5241.21,2560.04 R13.1@5243.71,2560.04 v1(5273.75,2560) R26.1@5303.78,2560.04 5303.27,2560.55 5303.27,2608.75 R25.1@5302.77,2609.25 C25.1@5302.77,2658.46 5300.27,2658.46 5244.79,2713.94 U13.5@5244.79,2786.41
  Bottom Layer w10: U17.12@5053.68,2651.67 5088.33,2651.67 cw(c5088.33,2625) 5115,2625 ccw(c5180,2625) 5180,2560 v1(5273.75,2560)
W2_2: C43.1 C51.2 R23.1 R27.1 R29.1 U7.5 U17.4 | length 683.2
  Top Layer w10: C51.2@4585.28,2510.83 4587.78,2510.83 4592.78,2515.83 4592.78,2520.83 4631.99,2560.04 R27.1@4634.49,2560.04 v1(4664.02,2560.04) R29.1@4693.54,2560.04 4693.04,2560.55 4693.04,2608.75 R23.1@4692.53,2609.25 C43.1@4692.53,2658.46 4690.03,2658.46 4685.03,2663.46 4685.03,2665.96 4634.55,2716.45 U7.5@4634.55,2786.5
  Bottom Layer w10: v1(4664.02,2560.04) 4664.02,2669.02 cw(c4696.67,2669.02) 4696.67,2701.67 U17.4@4835.64,2701.67
pads on no net: CN1.5 CN1.6 CN2.5 CN2.6 LED6.2 P1.0 U2.5 U4.2 U4.3 U4.4 U4.14 U4.22 U4.28 U4.29 U4.40 U4.43 U4.44 U5.5 U7.7 U7.9 U7.16 U8.5 U9.3 U9.6 U10.3 U10.6 U11.3 U11.6 U12.3 U12.6 U13.7 U13.9 U13.16 U14.3 U14.4 U16.8 U17.2 U17.14 USB1.2 USB1.3 USB1.9 USB1.11

## Polygon pours and split planes (outlines as drawn)
GND on Top Layer "NONET_L-01_P-001" (solid, remove dead copper, pour order 32): 2005,3750 2205,3750 2280,3825 2280,4030 3530,4030 3530,3775 3460,3775 3460,3655 3630,3655 4150,3135 4150,2415 3665,2415 3665,2285 2690,2285 2690,2350 2005,2350
GND on Top Layer "NONET_L-01_P-001" (solid, pour order 33): 2285,2185 2285,1895 3580,1895 3580,2140 3530,2190 3480,2190 3455,2165 3455,2105 2690,2105 2690,2160 2665,2185
VIN on Top Layer "Top Layer-VIN" (solid, pour order 10): 4735,2335 4855,2215 5100,2215 5190,2305 5190,2435 5070,2555 5070,2860 5185,2860 5185,2895 5070,2895 5070,3060 5080,3070 5145,3070 5145,3265 4945,3265 4945,3060 4965,3040 4965,2490 5000,2455 5000,2370 4960,2330 4885,2330 4775,2440 4520,2440 4460,2500 4460,2860 4575,2860 4575,2895 4460,2895 4460,2900 4460,3065 4525,3065 4525,3265 4350,3265 3980,3635 3980,3845 3865,3845 3865,3545 4320,3090 4320,2375 4275,2330 4275,2290 4205,2290 4205,2270 4275,2270 4285,2260 4335,2260 4410,2335
3V3 on Top Layer "NONET_L-01_P-001" (solid, pour order 29): 3680,2305 3870,2305 3870,2370 3845,2395 3680,2395
A2_1 on Top Layer "Top Layer-A2_1" (solid, pour order 26): 4470,2505 4525,2450 4780,2450 4890,2340 4955,2340 4990,2375 4990,2450 4955,2485 4955,3040 4935,3060 4935,3280 5090,3280 5090,3865 5220,3865 5220,3690 5445,3690 5445,3270 5530,3270 5530,3220 5470,3220 5460,3210 5460,3065 5435,3040 5350,3040 5330,3020 5330,2960 5315,2945 5315,2905 5310,2900 5195,2900 5195,2815 5315,2815 5315,2885 5350,2920 5420,2920 5450,2890 5450,2665 5380,2595 5380,2485 5185,2485 5175,2495 5175,2530 5195,2530 5215,2550 5215,2585 5195,2585 5185,2595 5185,2640 5090,2640 5090,2639.69 5080,2629.69 5080,2555 5200,2435 5200,2300 5105,2205 4755,2205 4755,1900 5310,1900 5310,2095 5590,2375 5590,3705 5545,3750 5385,3750 5300,3835 5300,4030 3545,4030 3545,3760 3470,3760 3470,3670 3630,3670 4160,3140 4160,2335 4265,2335 4310,2380 4310,3085 3850,3545 3850,3860 3995,3860 3995,3635 4345,3285 4475,3285 4475,3865 4600,3865 4600,3690 4820,3690 4820,3280 4905,3280 4905,3220 4855,3220 4840,3205 4840,3050 4830,3040 4750,3040 4725,3015 4725,2970 4705,2950 4705,2911.86 4693.14,2900 4585,2900 4585,2815 4705,2815 4705,2888.14 4716.86,2900 4774.5,2900 4774.5,2909.5 4806,2909.5 4806,2948 4823,2965 4850,2965 4850,2660 4780,2590 4780,2490 4565,2490 4565,2530 4580,2530 4600,2550 4600,2575 4585,2575 4560,2600 4560,2635 4470,2635
NetC9_1 on Top Layer "NONET_L-01_P-001" (solid, pour order 0): 4375,2200 4335,2200 4315,2180 4315,1895 4735,1895 4735,2180 4715,2200
A2_1 on Top Layer "NONET_L-01_P-001" (solid, pour order 27): 3680,2175 3680,2290 3835,2290 3835,2230 3780,2175
24to12_1 on Top Layer "NONET_L-01_P-001" (solid, pour order 5): 5105,3850 5105,3280 5225,3280 5225,3450 5230,3445 5430,3445 5430,3675 5205,3675 5205,3850
A2_1 on Top Layer "NONET_L-01_P-001" (solid, pour order 13): 3680,2135 3680,2115 3740,2055 3965,2055 3965,2190 3915,2190 3915,2245 3880,2245 3880,2190 3865,2190 3810,2135
NetC42_1 on Top Layer "NONET_L-01_P-001" (solid, pour order 6): 5180,3220 5240,3220 5240,3430 5430,3430 5430,3089.88 5410.12,3070 5180,3070
NetC52_1 on Top Layer "NONET_L-01_P-001" (solid, pour order 3): 4560,3220 4620,3220 4620,3430 4810,3430 4810,3089.88 4790.12,3070 4560,3070
A2_1 on Top Layer "NONET_L-01_P-001" (solid, pour order 14): 4210,2190 4210,2235 4280,2235 4290,2245 4320,2245 4320,2205 4305,2190
+5 on Top Layer "NONET_L-01_P-001" (solid, pour order 12): 2005,2335 2005,2200 2670,2200 2710,2160 2710,2115 2795,2115 2795,2160 2830,2195 2890,2195 2935,2150 2935,2115 3015,2115 3010,2120 3010,2160 3045,2195 3105,2195 3155,2145 3155,2115 3225,2115 3230,2120 3230,2165 3265,2200 3315,2200 3365,2150 3365,2120 3445,2120 3445,2170 3480,2205 3530,2205 3595,2140 3595,2075 3775,1895 4115,1895 4115,2125 3975,2125 3975,2045 3735,2045 3670,2110 3670,2190 3600,2190 3550,2240 3550,2275 3475,2275 3475,2245 3425,2195 3370,2195 3325,2240 3325,2275 3255,2275 3255,2235 3210,2190 3155,2190 3105,2240 3105,2275 3045,2275 3045,2245 2995,2195 2950,2195 2890,2255 2890,2275 2825,2275 2825,2240 2780,2195 2720,2195 2680,2235 2680,2335
NetC62_2 on Top Layer "NONET_L-01_P-001" (solid, pour order 11): 4015,2205 4015,2155 4030,2140 4130,2140 4130,1895 4295,1895 4295,2180 4200,2180 4200,2245 4270,2245 4270,2265 4180,2265 4180,2210 4135,2165 4050,2165 4040,2175 4040,2205
24to12_2 on Top Layer "NONET_L-01_P-001" (solid, pour order 4): 4485,3850 4485,3280 4605,3280 4605,3450 4610,3445 4810,3445 4810,3675 4585,3675 4585,3850
GND on GND "NONET_L-01_P-001" (solid, pour order 37): 2205,3750 2280,3825 2280,4030 3530,4030 3530,3760 4150,3140 4150,2460 3825,2460 3675,2310 3675,1895 2285,1895 2285,2090 2200,2175 2005,2175 2005,3750
A2_1 on GND "NONET_L-01_P-001" (solid, pour order 36): 3685,2300 3685,1895 5310,1895 5310,2095 5590,2375 5590,3705 5545,3750 5385,3750 5300,3835 5300,4030 3545,4030 3545,3765 4165,3145 4165,2445 3830,2445
A2_1 on Bottom Layer "NONET_L-01_P-001" (solid, remove dead copper, pour order 28): 3685,2300 3685,1895 5310,1895 5310,2095 5590,2375 5590,3705 5545,3750 5385,3750 5300,3835 5300,4030 3545,4030 3545,3765 4165,3145 4165,2445 3830,2445
GND on Bottom Layer "NONET_L-01_P-001" (solid, remove dead copper, pour order 30): 2205,3750 2280,3825 2280,4030 3530,4030 3530,3760 4150,3140 4150,2460 3825,2460 3675,2310 3675,1895 2285,1895 2285,2090 2200,2175 2005,2175 2005,3750
A2_1 on Sign "NONET_L-01_P-001" (solid, remove dead copper, pour order 34): 3685,2300 3685,1895 5310,1895 5310,2095 5590,2375 5590,3705 5545,3750 5385,3750 5300,3835 5300,4030 3545,4030 3545,3765 4165,3145 4165,2445 3830,2445
GND on Sign "NONET_L-01_P-001" (solid, remove dead copper, pour order 35): 2205,3750 2280,3825 2280,4030 3530,4030 3530,3760 4150,3140 4150,2460 3825,2460 3675,2310 3675,1895 2285,1895 2285,2090 2200,2175 2005,2175 2005,3750

## Silkscreen, mask and mechanical layers (free items; w line width, h text height)
Mechanical 1:
  the board outline again, w10